# Altium PCB SENSEI_Base-Board.PcbDoc (part 10 of 10)
Units mm, origin at the board's own origin, x right, y up, seen from the top; angles counter-clockwise.
Board outline 51.6 x 28.1 mm, 8 copper layers (Top Sig/Pwr, GND1, Sig1, GND2, Sig2, Pwr, GND3, Bot Sig/Pwr), stack 1.53 mm thick; 209 components, 201 nets, 1031 pads, 2222 vias.
Unrouted connection lines stored in the file: 214.
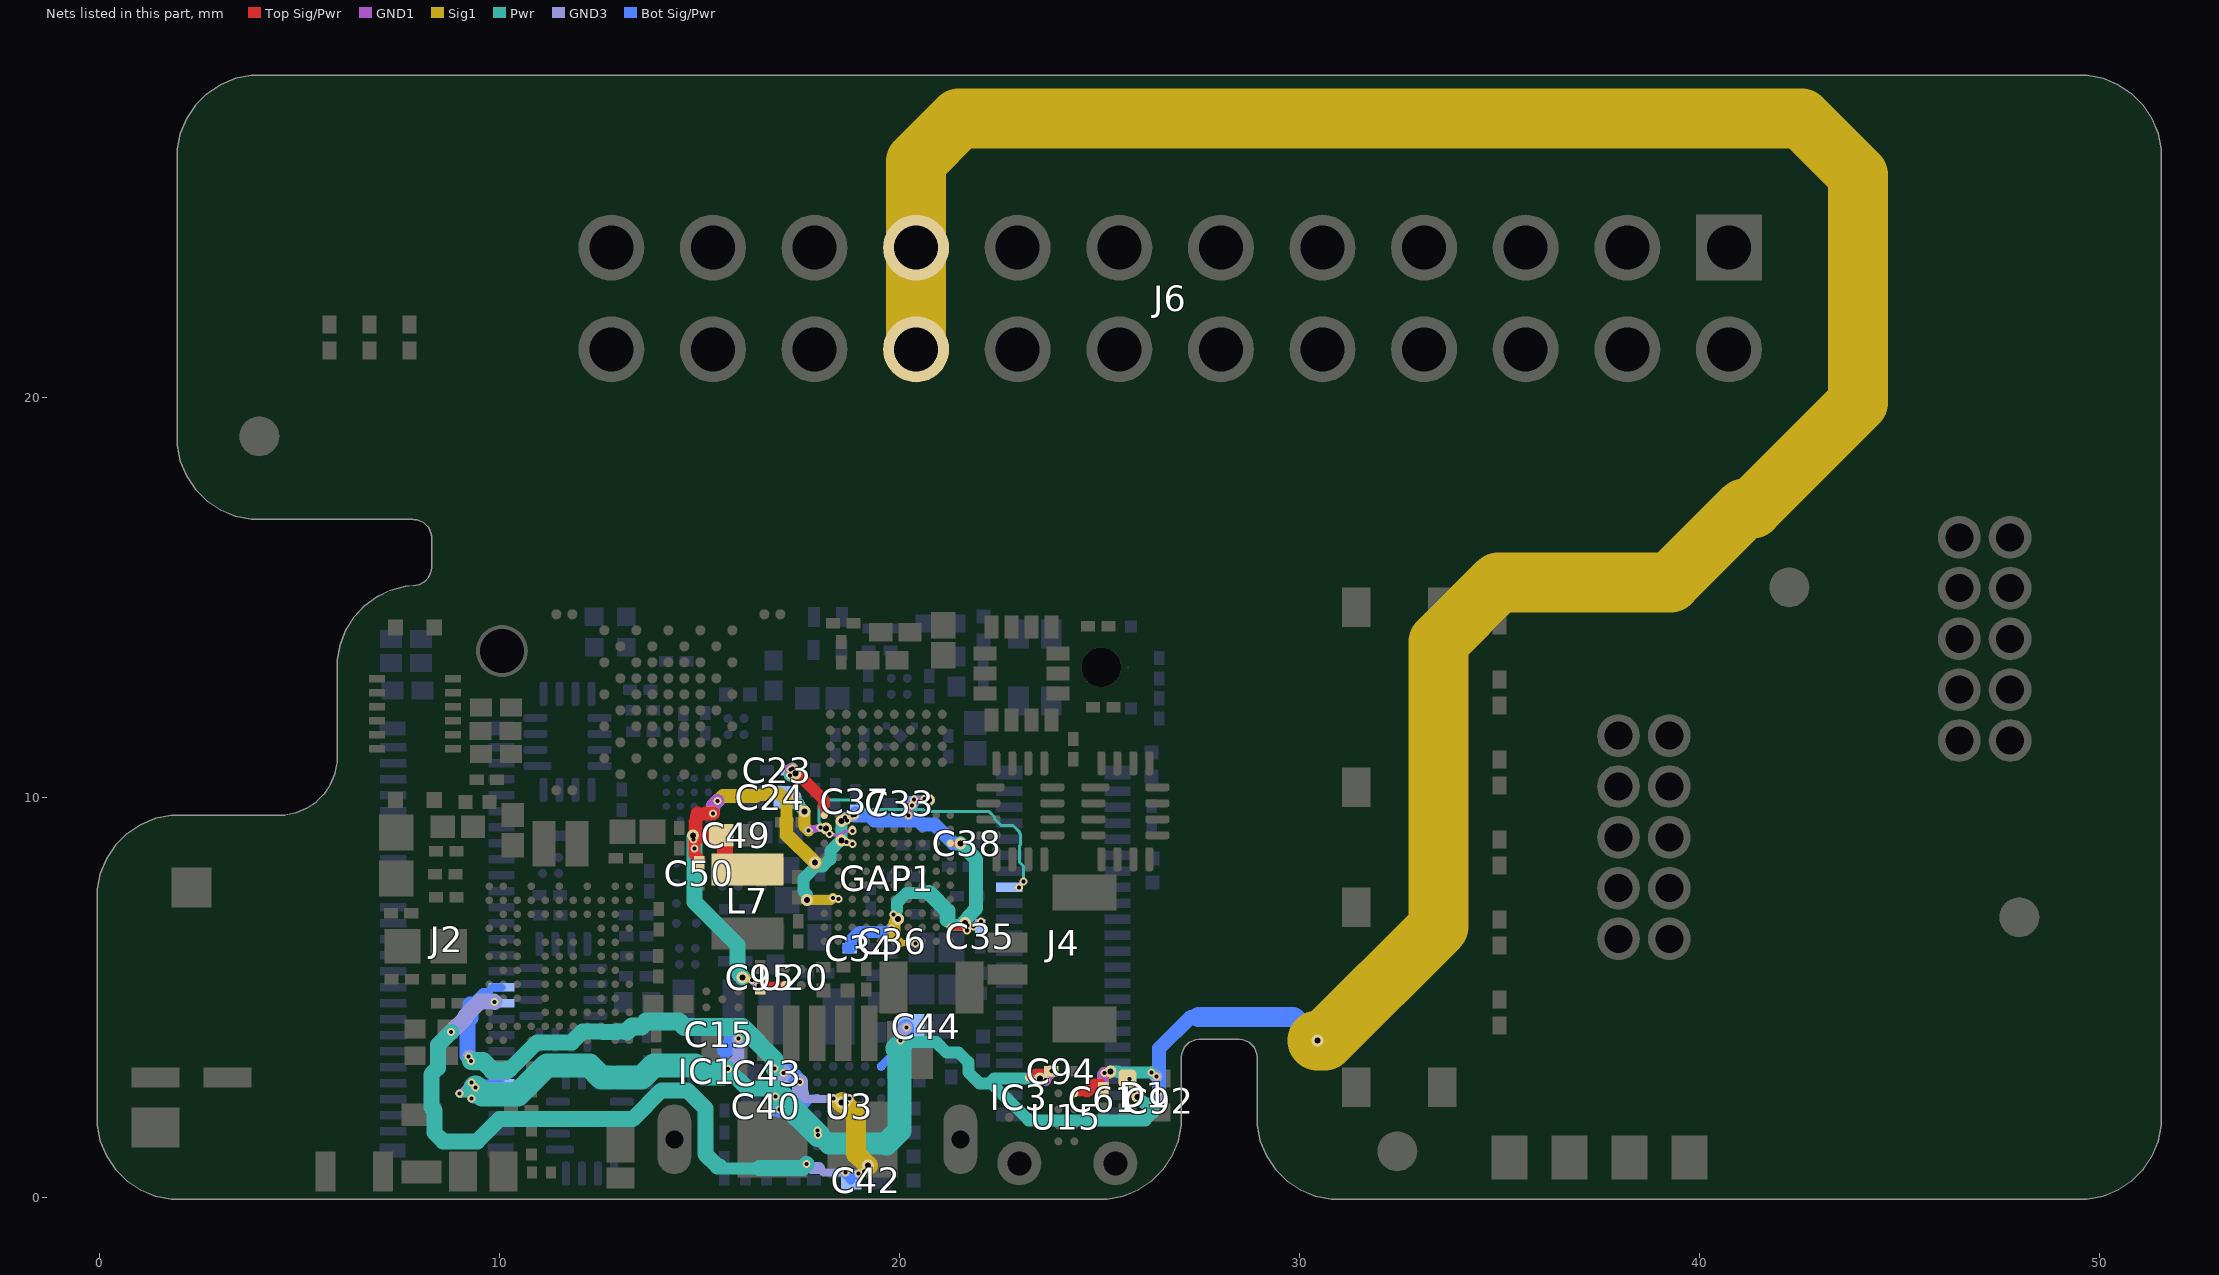
[diagram p15: the nets of this part, all layers, seen from the top]

## Via types
v1: diameter 0.2, hole 0.1, Top Sig/Pwr to GND1, 544 vias
v2: diameter 0.2, hole 0.1, GND3 to Bot Sig/Pwr, 436 vias
v3: diameter 0.2, hole 0.1, GND1 to Sig1, 385 vias
v4: diameter 0.3, hole 0.15, Sig1 to Pwr, 293 vias
v5: diameter 0.3, hole 0.15, Top Sig/Pwr to Bot Sig/Pwr, tented both sides, 284 vias
v6: diameter 0.2, hole 0.1, Pwr to GND3, 280 vias

## Nets (pads, with @x,y where several pads share a name; then routed paths per layer and width w, separated by ;. In a path a pad name is that pad's centre, name@x,y a point inside that pad or via, vN(x,y) a via of type N, cw(c..) or ccw(c..) an arc to the next point about the centre after c; other vN are vias at no path point) (continued)
VD1: C42.1 J2.9 U3.C4 | length 19.7
  GND3 w0.2: 17.987,0.735 18.104,0.618 18.562,0.618 18.569,0.625 v2(18.65,0.625) ; v6(18.684,2.36) 18.684,2.409 v2(18.75,2.475) ; v2(18.982,0.6) 19.07,0.6 v6(19.118,0.647)
  GND3 w0.3: v6(17.686,0.836) 17.707,0.836 17.808,0.735 17.987,0.735
  GND3 w0.4: v6(8.79,4.128) 9.155,4.493 9.155,4.535 9.52,4.9 9.86,4.9 v2(9.875,4.885)
  Sig1 w0.5: v4(18.558,2.365) 18.58,2.387 18.923,2.044 18.923,1.087 v4(19.217,0.793)
  Pwr w0.2: v4(18.558,2.365) 18.564,2.36 v6(18.684,2.36) ; v6(19.118,0.647) 19.118,0.666 19.217,0.765 v4(19.217,0.793)
  Pwr w0.3: 15.505,0.775 15.555,0.725 16.502,0.725 16.508,0.735
  Pwr w0.4: v6(8.79,4.128) 8.465,3.803 8.465,3.238 8.3,3.073 8.3,2.25 8.375,2.175 8.375,1.62 8.595,1.4 9.45,1.4 10.002,1.952 13.331,1.952 14.054,2.675 14.696,2.675 15.15,2.221 15.15,1.08 15.455,0.775 15.505,0.775 ; 16.508,0.735 17.585,0.735 v6(17.686,0.836)
  Bot Sig/Pwr w0.2: v2(18.65,0.625) 18.65,0.561 18.786,0.425 C42.1@18.796,0.425 ; C42.1@18.815,0.529 18.922,0.529 18.982,0.589 v2(18.982,0.6)
VD2: C43.1 J2.10 U3.D4 | length 13.3
  GND3 w0.2: 17.674,2.457 17.67,2.461 17.67,2.469 17.682,2.457 18.332,2.457 v2(18.35,2.475)
  GND3 w0.3: v2(9.224,3.525) v6@9.294,3.456 ; v2@9.228,3.529 v6@9.294,3.463
  GND3 w0.4: v6(9.294,3.403) v6@9.294,3.456 ; v6(16.884,3.222) 17.002,3.104 v2(17.105,3.104) ; v2(17.517,2.878) 17.517,2.621 17.549,2.59
  Pwr w0.4: 10.217,3.2 10.267,3.2 10.943,3.875 11.814,3.875 12.085,4.147 12.557,4.147 12.575,4.129 12.927,4.129 12.945,4.147 13.189,4.147
  Pwr w0.45: v6(9.294,3.403) 9.595,3.403 9.823,3.176 10.192,3.176 10.217,3.2 ; 13.189,4.147 13.314,4.272 13.55,4.272 13.674,4.395 14.491,4.395 14.632,4.254 16.079,4.254 16.884,3.45 v6(16.884,3.222)
  Bot Sig/Pwr w0.2: 9.277,4.824 9.588,5.135 9.72,5.135 9.825,5.24 10.045,5.24 J2.10@10.055,5.25
  Bot Sig/Pwr w0.4: v2(9.224,3.525) 9.2,3.549 9.2,4.405 9.277,4.483 9.277,4.824 ; v2(17.105,3.104) 17.075,3.134 17.075,3.15 17.096,3.15 17.133,3.114 17.282,3.114 v2(17.517,2.878)
VOPM: C23.1 GAP1.A10 | length 2.4
  Top Sig/Pwr w0.15: 18.112,9.797 18.112,9.588 18.118,9.581 18.118,9.557 GAP1.A10@18.125,9.55
  Top Sig/Pwr w0.3: v1(17.425,10.625) 18.112,9.938 18.112,9.797
  GND1 w0.3: v3(17.275,10.7) 17.35,10.625 v1(17.425,10.625)
  GND3 w0.3: v6(17.267,10.549) 17.3,10.582 17.3,10.7 v2(17.325,10.725)
  Sig1 w0.3: v3(17.275,10.7) 17.3,10.7 v4(17.4,10.6)
  Pwr w0.3: v6(17.267,10.549) 17.35,10.55 v4(17.4,10.6) 17.35,10.6 v6@17.3,10.55
  Bot Sig/Pwr w0.15: C23.1@17.254,10.675 17.374,10.675 17.431,10.618
VQPS_FUSE_1V8: GAP1.C9 J4.14 | length 8.4
  Top Sig/Pwr w0.15: GAP1.C9@18.825,9.2 18.828,9.197 v1(18.828,9.163)
  GND1 w0.075: v3(18.257,9.088) 18.281,9.065 18.368,9.065 18.37,9.062 18.538,9.062 18.615,9.14 18.805,9.14 v1(18.828,9.163)
  GND3 w0.075: v2(22.997,7.743) 22.997,7.762 23.109,7.874 v6(23.109,7.893)
  Sig1 w0.075: v4(18.163,9.22) 18.163,9.183 v3(18.257,9.088)
  Pwr w0.075: v4(18.163,9.22) 18.152,9.22 17.989,9.384 17.989,9.785 18.143,9.939 18.887,9.939 19.13,9.695 20.607,9.695 20.653,9.649 22.235,9.649 22.379,9.505 22.379,9.463 22.547,9.295 22.843,9.295 23.011,9.127 23.011,9.099 23.024,9.086 23.024,8.805 23.011,8.793 23.011,8.657 23.011,8.521 23.011,8.369 23.109,8.271 v6(23.109,7.893)
VRAR_OUT: C33.1 C34.1 C35.1 C36.1 C37.1 C38.1 C49.1 C50.1 C95.1 GAP1.B4 GAP1.C8 GAP1.C10 GAP1.G1 GAP1.G10 GAP1.K2 GAP1.K8 L7.2 U20.A2 | length 32.2
  Top Sig/Pwr w0.15: GAP1.B4@18.475,7.45 18.475,7.459 v1(18.477,7.461) ; v1(18.825,8.831) GAP1.C8@18.825,8.85 ; GAP1.G10@20.225,9.545 GAP1.G10@20.225,9.55 ; GAP1.K2@21.275,6.75 21.277,6.748 21.593,6.748 21.674,6.666 v1(21.688,6.666) ; GAP1.K8@21.275,8.85 21.277,8.848 21.527,8.848 v5(21.529,8.846)
  Top Sig/Pwr w0.2: v1(16.475,5.3) 16.475,5.246 16.525,5.196 16.525,5.214 16.606,5.295 17.145,5.295 U20.A2@17.15,5.3
  Top Sig/Pwr w0.3: 14.875,9.05 14.875,8.575 15,8.45 C50.1@15,8.404
  Top Sig/Pwr w0.35: 14.876,9.007 14.999,9.007 15,9.009 15,9.035 15.006,9.042 15.47,9.042 15.523,8.989 C49.1@15.523,8.95 ; 14.911,9.037 14.911,9.374 14.95,9.6 ; 15.137,9.6 v1(15.349,9.6)
  Top Sig/Pwr w0.4: C49.1@15.523,8.95 15.648,9.075 15.648,8.4 15.848,8.2 L7.2@16.2,8.2
  GND1 w0.15: v3(18.342,7.479) 18.351,7.47 18.468,7.47 v1(18.477,7.461) ; v3(18.679,8.88) 18.688,8.87 18.772,8.87 18.811,8.831 v1(18.825,8.831) ; v3(18.694,9.416) v3(18.694,9.416) 18.825,9.548 v1(18.825,9.55) ; v1(20.225,6.4) 20.235,6.39 20.274,6.39 20.304,6.36 20.39,6.36 v3(20.4,6.35) ; v1(21.688,6.666) 21.698,6.676 21.698,6.767 21.711,6.781 v3(21.711,6.794)
  GND1 w0.2: v3(16.32,5.434) 16.454,5.3 v1(16.475,5.3) ; v1(20.226,9.545) 20.226,9.76 20.39,9.924 20.432,9.924 ; 20.433,9.925 20.598,9.925 v3(20.634,9.96)
  GND1 w0.25: v1(15.349,9.6) v1@15.349,9.673
  GND1 w0.3: v3(14.85,8.95) 14.85,8.75 v1(14.875,8.725)
  GND1 w0.35: v1@15.349,9.673 15.349,9.793 v3(15.458,9.903)
  GND3 w0.15: v6(18.647,9.494) v6@18.657,9.504 ; v2@18.88,9.552 v2(18.893,9.552) ; v2(19.808,6.714) 19.817,6.723 19.817,6.863 19.842,6.887 19.842,7.065 v6(19.852,7.075) ; v6(21.85,6.775) 21.864,6.775 21.973,6.884 22.027,6.884 v2(22.037,6.894)
  GND3 w0.2: v2(20.313,9.796) 20.365,9.849 v6(20.365,9.951)
  GND3 w0.25: v6@18.657,9.504 18.831,9.504 v2@18.88,9.552
  Sig1 w0.15: v4(18.555,8.923) 18.584,8.894 18.651,8.894 18.665,8.88 v3(18.679,8.88) ; v4(18.556,9.403) 18.562,9.409 18.688,9.409 v3(18.694,9.416) ; 20.047,6.361 20.262,6.361 20.263,6.36 20.39,6.36 v3(20.4,6.35) ; v4(21.637,6.863) 21.64,6.863 21.708,6.794 v3(21.711,6.794)
  Sig1 w0.2: v4(14.839,9.041) 14.81,9.07 14.822,9.035 v3(14.85,8.95) ; v4(16.08,5.495) 16.099,5.476 16.279,5.476 v3(16.32,5.434) ; 19.878,6.529 20.047,6.361 ; v3(20.634,9.96) 20.647,9.948 20.726,9.948 v4(20.745,9.928)
  Sig1 w0.25: v4(17.694,7.435) 18.297,7.435 v3(18.342,7.479)
  Sig1 w0.3: 16.407,10.038 16.428,10.058 16.616,10.058 16.654,10.096 17.005,10.096 17.181,9.92 17.181,9.427 ; 19.878,6.529 19.878,6.874 v4(19.962,6.958)
  Sig1 w0.35: v3(15.458,9.903) 15.593,10.038 16.407,10.038 ; 17.181,9.427 17.181,9.073 v4(17.89,8.364)
  Pwr w0.15: v4(18.556,9.403) v6(18.647,9.494) ; v4(21.637,6.863) 21.724,6.787 v6(21.85,6.775)
  Pwr w0.2: v6(19.852,7.075) 19.962,6.964 v4(19.962,6.958) ; v6(20.365,9.951) 20.372,9.943 20.73,9.943 v4(20.745,9.928)
  Pwr w0.25: 18.284,8.448 18.284,8.505
  Pwr w0.3: v4(17.694,7.435) 17.694,7.567 17.606,7.655 17.606,7.966 17.965,8.325 18.039,8.325 18.09,8.275 ; v4@17.915,8.275 18.09,8.275 ; 18.284,8.448 18.263,8.448 18.09,8.275 ; 18.284,8.505 18.284,8.671 18.536,8.923 v4(18.555,8.923) ; v4@18.555,8.942 18.555,9.394 v4@18.561,9.4 ; 19.943,7.166 19.943,7.369 20.184,7.61 20.748,7.61 ; 21.2,6.95 21.349,6.801 21.575,6.801 21.575,6.875 21.725,7.025
  Pwr w0.35: v5(21.529,8.846) 21.924,8.451 21.924,7.224 21.725,7.025
  Pwr w0.4: v4@14.876,9.007 14.876,7.387 15.953,6.31 15.953,5.714 16.001,5.666 16.001,5.574 v4(16.08,5.495) ; 20.748,7.61 21.2,7.158 21.2,6.95
  Bot Sig/Pwr w0.3: C34.1@18.712,6.227 18.758,6.227 18.789,6.258 18.789,6.422 19.001,6.633 C36.1@19.777,6.633 ; C36.1@19.808,6.597 v2(19.808,6.714)
  Bot Sig/Pwr w0.35: v2(18.893,9.552) C37.1@18.9,9.559 ; C37.1@18.9,9.596 C37.1@18.9,9.559 ; 20.268,9.425 20.472,9.425 20.578,9.319 20.878,9.319 21.352,8.846 21.397,8.846 v5(21.529,8.846) ; C33.1@20.32,9.856 20.274,9.856 20.268,9.85 20.268,9.578 20.115,9.425 19.381,9.425 19.262,9.544 18.906,9.544 18.9,9.55 C37.1@18.9,9.559
VSAFE: C24.1 GAP1.A9 | length 1.7
  Top Sig/Pwr w0.18: v1(18.031,9.246) GAP1.A9@18.125,9.2
  GND1 w0.2: v3(17.725,9.175) v1(18.031,9.246)
  GND3 w0.3: v2(17.4,10.025) 17.4,9.925 v6(17.475,9.85)
  Sig1 w0.3: v4(17.625,9.65) 17.625,9.275 v3(17.725,9.175)
  Pwr w0.3: v6(17.475,9.85) 17.475,9.8 v4(17.625,9.65)
  Bot Sig/Pwr w0.15: C24.1@17.202,10 C24.1@17.442,9.761
VSYS: C15.1 C40.1 C44.1 C61.1 C92.1 C94.1 D1.1 IC1.A1 IC1.B1 IC3.A2 J2.3 J2.4 J6.17 J6.18 U3.A6 U3.E2 U3.E4 U15.A2 | length 101.6
  Top Sig/Pwr w0.18: IC3.A2@23.25,3 23.262,3 23.392,3.13 23.747,3.13 C94.1@23.767,3.15 ; U15.A2@24.375,2.6 24.379,2.604 24.657,2.604 24.696,2.643
  Top Sig/Pwr w0.3: 24.696,2.643 24.874,2.821 C61.1@25.036,2.821
  GND1 w0.3: v3(23.65,2.936) 23.65,2.988 23.807,3.145 v1(23.807,3.152) ; v1(25.091,2.721) 25.091,3.068 v3(25.127,3.104) ; v1(25.752,2.956) 25.752,2.78 v3(25.87,2.662)
  GND3 w0.2: v6(9,2.6) 9.048,2.6 9.148,2.7 9.175,2.7 ; v2@9.25,2.825 9.25,2.7 9.3,2.65 v2(9.3,2.475) ; v2(9.3,2.875) 9.4,2.775 v6(9.4,2.75) ; v6(16.9,2.525) 16.9,2.3 v2(17,2.2) ; v2(17.95,1.675) 17.95,1.573 v6(17.965,1.558)
  GND3 w0.3: v6(15.715,3.209) 15.975,3.47 v2(15.975,3.975) ; v6@20.019,3.919 20.019,4.094 v2(20.175,4.25) ; v6(26.311,3.12) 26.414,3.017 v2(26.424,3.017) ; v6@26.371,2.344 26.474,2.447 v2(26.474,2.63)
  Sig1 w0.2: v4(23.522,2.964) 23.541,2.945 23.642,2.945 v3(23.65,2.936)
  Sig1 w0.3: v3@25.127,3.103 25.239,3.103 v4(25.284,3.148) ; v3(25.87,2.662) 25.957,2.575 v4(25.957,2.51)
  Sig1 w1.5: J6.18@20.42,21.2 J6.17@20.42,23.74 20.42,25.895 21.49,26.965 42.559,26.965 43.965,25.559 43.965,19.864 41.327,17.226 41.125,17.226 39.274,15.375 34.976,15.375 33.482,13.882 33.482,6.769 30.634,3.921 v5(30.451,3.921)
  Pwr w0.2: v6(9,2.6) 9.225,2.6 9.3,2.675
  Pwr w0.3: 19.95,3.725 20.106,3.881 20.919,3.881 21.175,3.625 21.476,3.625 21.725,3.376 21.725,3.131 22.006,2.85 22.255,2.85 22.282,2.876 ; v4(23.522,2.964) 22.369,2.964 22.282,2.876 ; v4(25.284,3.148) 25.472,3.148 25.5,3.12 v6(26.311,3.12) ; v4@25.953,2.522 26.131,2.344 v6(26.35,2.344) 26.35,2.125 26.15,1.925 23.233,1.925 22.282,2.876
  Pwr w0.4: 15.598,3.093 v6(15.715,3.209) 15.715,3.205 16.197,2.722 16.851,2.722 16.947,2.625
  Pwr w0.5: v6(17.965,1.558) 18.004,1.558 18.243,1.319
  Pwr w0.55: 18.266,1.343 19.677,1.343
  Pwr w0.6: v6(9.4,2.75) 9.575,2.575 10.465,2.575 11.187,3.297 12.251,3.297 12.559,2.989 13.555,2.989 13.866,3.3 14.825,3.3 ; 14.888,3.297 15.092,3.093 15.598,3.093 ; 16.947,2.625 17.071,2.501 17.071,2.451 v6(17.965,1.558) ; 19.677,1.343 20.003,1.669 20.003,3.672 19.95,3.725
  Bot Sig/Pwr w0.075: IC1.A1@15.598,3.344 IC1.A1@15.6,3.342 ; IC1.B1@15.6,2.95 IC1.A1@15.6,3.342
  Bot Sig/Pwr w0.18: IC1.A1@15.6,3.342 IC1.A1@15.606,3.348 ; IC1.A1@15.6,3.35 15.604,3.35 IC1.A1@15.606,3.348 ; IC1.A1@15.607,3.348 15.607,3.638 15.649,3.68 ; IC1.A1@15.609,3.345 IC1.A1@15.606,3.348
  Bot Sig/Pwr w0.2: v2(9.3,2.475) 9.3,2.559 9.217,2.642 9.217,2.758 9.3,2.841 v2(9.3,2.875) 9.325,2.85 J2.4@10.055,2.85 ; v2@9.317,2.492 9.359,2.45 9.409,2.45 ; v2@9.367,2.492 9.409,2.45 ; J2.3@10.055,2.45 9.409,2.45 ; 17.473,2.374 17.477,2.378 ; 17.641,2.378 17.695,2.378 17.789,2.471 17.946,2.471 U3.E4@17.95,2.475 ; U3.A6@19.55,3.275 19.55,3.28 19.788,3.518 19.788,3.6
  Bot Sig/Pwr w0.3: 17.477,2.378 17.641,2.378 ; v2(26.474,2.63) 26.487,2.642 C92.1@26.487,2.706
  Bot Sig/Pwr w0.35: C92.1@26.495,2.722 26.495,3.719 27.289,4.513 27.475,4.513
  Bot Sig/Pwr w0.4: 15.649,3.68 15.821,3.852 15.821,4.039 C15.1@15.857,4.075 ; C15.1@15.879,4.075 15.975,3.979 v2(15.975,3.975) ; v2(17,2.2) 17,2.269 17.043,2.311 17.277,2.311 17.346,2.38 17.479,2.38 ; 19.908,3.6 20.172,3.864 C44.1@20.172,4.241
  Bot Sig/Pwr w0.5: 27.475,4.513 29.859,4.513 v5(30.451,3.921)
  other v6: 20.025,3.925
pads on no net: E1.2 E1.3 E1.4 FID1.0 FID2.0 FID3.0 FID4.0 FID5.0 FID6.0 FID7.0 FID8.0 GAP1.C3 GAP1.C4 GAP1.E6 GAP1.F6 GAP1.F7 GAP1.G8 GAP1.G9 GAP1.K10 J1.6 J1.7 J1.8 J1.9 J1.10 J1.11 J2.56 J3.7 J3.8 J4.24 J4.28 J4.30 J4.32 J4.41 J4.42 J4.43 J4.44 J5.MP1 J5.MP2 J5.MP3 J5.MP4 U1.A1 U1.A12 U1.B1 U1.B12 U1.D3 U1.D5 U1.D7 U1.D9 U1.D11 U1.E2 U1.E4 U1.E6 U1.E8 U1.E10 U1.F3 U1.F9 U1.F11 U1.G2 U1.G4 U1.G9 U1.G10 U1.H3 U1.H4 U1.H11 U1.J2 U1.J10 U1.K3 U1.K4 U1.K5 U1.K6 U1.K7 U1.K8 U1.K9 U1.K11 U1.L2 U1.L4 U1.L6 U1.L8 U1.L10 U1.M2 U1.M3 U1.M5 U1.M7 U1.M9 U1.M11 U1.P1 U1.P12 U1.R1 U1.R12 U2.A2 U2.A3 U2.A4 U2.A5 U2.A6 U2.B1 U2.B2 U2.B3 U2.B4 U2.B5 U2.B8 U2.C1 U2.C8 U3.A1 U5.D11 U9.2 U9.8 U9.9 U9.10 U10.2 U10.10 U11.2 U11.10 U12.2 U12.10 U13.2 U13.10 U17.A1 U17.B1 U17.C1 U17.C4 U17.D1 U17.D2 U17.D3 U21.10 Y2.4 Y3.4

## Polygon pours and split planes (outlines as drawn)
GND on Top Sig/Pwr "GND_L01_P028" (solid, pour order 28): 53,-2.5 53,30 -0.5,30 -0.5,10.55 7,10.55 7,-2.5
GND on Top Sig/Pwr "NONET_L-01_P-001" (solid, pour order 27): 7,1.45 10.1,1.45 10.4,1.45 10.4,1.875 9.9,1.875 9.9,3 7,3
NetL6_2 on Top Sig/Pwr "NONET_L-01_P-001" (solid, pour order 26): 6.825,0.189 6.825,0.15 9,0.15 9,1.15 6.825,1.15
NetC68_1 on Top Sig/Pwr "NONET_L-01_P-001" (solid, pour order 18): 9.65,1.15 9.65,0.15 10.425,0.15 10.425,1.15
GND on GND1 "GND_L02_P019" (solid, pour order 19): 53,-2.5 53,30 -0.5,30 -0.5,10.55 7,10.55 7,-2.5
GND on Sig1 "GND_L03_P020" (solid, pour order 20): 53,-2.5 53,30 -0.5,30 -0.5,10.55 7,10.55 7,-2.5
GND on GND2 "GND_L04_P021" (solid, pour order 21): 53,-2.5 53,30 -0.5,30 -0.5,10.55 7,10.55 7,-2.5
GND on Sig2 "GND_L05_P022" (solid, pour order 22): 53,-2.5 53,30 -0.5,30 -0.5,10.55 7,10.55 7,-2.5
GND on GND3 "GND_L07_P024" (solid, pour order 24): 53,-2.5 53,30 -0.5,30 -0.5,10.55 7,10.55 7,-2.5
GND on Bot Sig/Pwr "GND_L08_P025" (solid, pour order 25): 53,-2.5 53,30 -0.5,30 -0.5,10.55 7,10.55 7,-2.5
GND on Pwr "GND_L06_P023" (solid, pour order 23): 53,-2.5 53,30 -0.5,30 -0.5,10.55 7,10.55 7,-2.5

## Keep-outs
Keep-Out Layer:
  circle w0.1: c5,25 r1.6
  circle w0.1: c48.5,3 r1.6
  circle w0.1: c48.5,25 r1.6
  lines w0.1: 8.307,15.745 8.3,15.664 8.242,15.511 8.133,15.39 7.988,15.315 7.908,15.298 7.85,15.295 7.658,15.281 7.286,15.182 6.939,15.015 6.629,14.787 6.367,14.505 6.162,14.179 6.021,13.821 5.95,13.442 5.95,13.25 5.95,11 5.943,10.858 5.887,10.579 5.778,10.317 5.621,10.08 5.42,9.879 5.183,9.722 4.921,9.613 4.642,9.557 4.5,9.55 2.5,9.55 2,9.55 1.798,9.55 1.402,9.472 1.029,9.317 0.693,9.093 0.407,8.807 0.183,8.471 0.028,8.098 -0.05,7.702 -0.05,7.5 -0.05,2 -0.05,1.798 0.028,1.402 0.183,1.029 0.407,0.693 0.693,0.407 1.029,0.183 1.402,0.028 1.798,-0.05 3.798,-0.05 25.202,-0.05 25.598,0.028 25.971,0.183 26.307,0.407 26.592,0.693 26.817,1.028 26.971,1.402 27.05,1.798 27.05,1.999 27.05,3.5 27.059,3.588 27.126,3.75 27.25,3.874 27.412,3.941 27.5,3.95 28.5,3.95 28.588,3.941 28.75,3.874 28.874,3.75 28.941,3.588 28.95,3.5 28.95,2 28.95,1.798 29.028,1.402 29.183,1.029 29.407,0.693 29.693,0.407 30.029,0.183 30.402,0.028 30.798,-0.05 31,-0.05 49.5,-0.05 49.702,-0.05 50.098,0.028 50.471,0.183 50.807,0.407 51.093,0.693 51.317,1.029 51.472,1.402 51.55,1.798 51.55,2 ; 8.307,15.75 8.307,16.495 8.299,16.583 8.232,16.745 8.107,16.869 7.945,16.936 7.858,16.945 7.836,16.95 4,16.95 3.798,16.95 3.402,17.028 3.029,17.183 2.693,17.407 2.407,17.693 2.183,18.029 2.028,18.402 1.95,18.798 1.95,19 1.95,26 1.95,26.202 2.028,26.598 2.183,26.971 2.407,27.307 2.693,27.593 3.029,27.817 3.402,27.972 3.798,28.05 4,28.05 49.5,28.05 49.702,28.05 50.098,27.972 50.471,27.817 50.807,27.593 51.093,27.307 51.317,26.971 51.472,26.598 51.55,26.202 51.55,26 ; 9.358,15.75 9.358,16.495 9.358,16.595 9.434,16.778 9.574,16.919 9.758,16.995 9.858,16.995 ; 51.55,2 51.55,26 ; 9.358,15.726 9.358,15.726 ; 9.358,15.726 9.358,15.63 9.431,15.454 9.566,15.319 9.743,15.245 9.838,15.245 14,15.25 ; 9.858,16.995 9.858,16.995 ; 9.858,16.995 9.858,16.994 14,16.998 14,17 14.099,17 14.283,16.924 14.424,16.783 14.5,16.599 14.5,16.5 ; 14,15.25 14,15.25 ; 14,15.25 14,15.25 ; 14,15.25 14.099,15.25 14.283,15.326 14.424,15.467 14.5,15.651 14.5,15.75 14.5,16.5 ; 14.5,16.5 14.5,16.5 ; 15.5,15.75 15.5,15.75 ; 15.5,15.75 15.5,15.651 15.576,15.467 15.717,15.326 15.901,15.25 16,15.25 22,15.25 ; 15.5,15.75 15.5,16.5 15.5,16.599 15.576,16.783 15.717,16.924 15.901,17 16,17 ; 16,17 22,17 22.099,17 22.283,16.924 22.424,16.783 22.5,16.599 22.5,16.5 ; 16,17 16,17 ; 22,15.25 22,15.25 ; 22,15.25 22.099,15.25 22.283,15.326 22.424,15.467 22.5,15.651 22.5,15.75 22.5,16.5 ; 22.5,16.5 22.5,16.5 ; 23.5,15.75 23.5,15.75 ; 23.5,15.75 23.5,15.651 23.576,15.467 23.717,15.326 23.901,15.25 25,15.25 25.196,15.24 25.581,15.164 25.943,15.014 26.269,14.796 26.546,14.519 26.764,14.193 26.914,13.831 26.99,13.446 27,13.25 27,11.5 ; 23.5,15.75 23.5,16.5 23.5,16.599 23.576,16.783 23.717,16.924 23.901,17 24,17 ; 24,17 27,17 27.197,17 27.583,16.923 27.947,16.772 28.275,16.553 28.554,16.275 28.772,15.947 28.923,15.583 29,15.197 29,15 ; 24,17 24,17 ; 27,5.5 27,5.401 27.076,5.217 27.217,5.076 27.401,5 27.5,5 28.5,5 ; 27,5.5 27,5.5 ; 27,5.5 27,9.5 27,9.599 27.076,9.783 27.217,9.924 27.401,10 27.5,10 ; 27,11.5 27,11.401 27.076,11.217 27.217,11.076 27.401,11 28.5,11 ; 27,11.5 27,11.5 ; 27.5,10 28.5,10 28.599,10 28.783,9.924 28.924,9.783 29,9.599 29,9.5 ; 27.5,10 27.5,10 ; 28.5,5 28.599,5 28.783,5.076 28.924,5.217 29,5.401 29,5.5 29,9.5 ; 28.5,5 28.5,5 ; 28.5,11 28.599,11 28.783,11.076 28.924,11.217 29,11.401 29,11.5 29,15 ; 28.5,11 28.5,11 ; 29,9.5 29,9.5 ; 29,15 29,15

## Other copper
Top Sig/Pwr:
  pour cut-out: 7,1.25 10.4,1.25 10.4,1.402 7,1.402
  pour cut-out: 10.05,1.875 10.05,4.075 11.35,4.075 11.35,3.475 11.4,3.425 11.4,1.025 11.4,0.625 11.175,0.625 11.175,0.05 10.4,0.05 10.4,1.875
GND1:
  pour cut-out: 6.825,1.15 10.45,1.15 10.45,-0.1 6.825,-0.1
GND2:
  pour cut-out: 6.825,1.15 10.425,1.15 10.425,-0.1 6.825,-0.1
Sig2:
  pour cut-out: 6.825,1.15 10.425,1.15 10.425,-0.1 6.825,-0.1
Sig1:
  pour cut-out: 6.825,1.15 10.45,1.15 10.45,-0.1 6.825,-0.1
Pwr:
  pour cut-out: 6.825,1.15 10.425,1.15 10.425,-0.1 6.825,-0.1
  pour cut-out: 12.2,7.1 13.65,5.65 13.65,5.225 14.225,5.225 14.675,5.675 14.575,5.775 14.575,6.725 14.325,6.725 13.325,7.725
  pour cut-out: 18.2,7.7 17.9,7.55 17.975,6.55 18.775,5.2 19.3,4.625 20.55,4.525 23.2,4.95 25.125,5.3 25.05,7.4 23.925,7.55 22.475,7.325 21.55,6.65 19.775,7.05 19.8,8.625 18.2,8.15
Bot Sig/Pwr:
  region net GND: 34.009,1.275 33.768,2.363 34.056,2.363 34.15,1.937 34.203,1.811 34.265,1.699 34.327,1.599 34.39,1.534 34.439,1.499 34.489,1.474 34.527,1.474 34.564,1.487 34.589,1.512 34.595,1.549 34.595,1.599 34.589,1.643 34.429,2.363 34.706,2.363 34.826,1.811 34.871,1.605 34.876,1.512 34.863,1.425 34.838,1.35 34.788,1.3 34.726,1.262 34.676,1.25 34.577,1.25 34.477,1.275 34.39,1.325 34.324,1.39 34.252,1.474 34.296,1.275
  region net GND: 31.466,2.342 31.523,2.363 31.585,2.372 31.685,2.372 31.797,2.363 31.915,2.334 32.015,2.285 32.096,2.222 32.146,2.172 32.196,2.11 32.239,2.035 32.27,1.961 32.302,1.873 32.32,1.792 32.333,1.711 32.333,1.605 32.32,1.512 32.302,1.449 32.27,1.387 32.233,1.337 32.183,1.3 32.127,1.275 32.071,1.262 31.946,1.25 31.884,1.25 31.772,1.262 31.702,1.28 31.672,1.287 31.646,1.532 31.703,1.512 31.784,1.493 31.847,1.487 31.89,1.487 31.94,1.499 31.984,1.524 32.009,1.549 32.027,1.587 32.04,1.63 32.046,1.674 32.046,1.73 32.034,1.811 32.009,1.892 31.978,1.961 31.94,2.017 31.884,2.085 31.834,2.116 31.784,2.135 31.734,2.141 31.66,2.141 31.591,2.135 31.56,2.129 31.516,2.116
  region net GND: 32.688,1.275 32.447,2.363 32.702,2.363 32.944,1.275
  region net GND: 33.291,2.06 33.224,2.363 33.48,2.363 33.721,1.275 33.466,1.275 33.427,1.451 33.367,1.643 33.299,1.811 33.243,1.917 33.165,2.02 33.112,2.073 33.068,2.104 33.025,2.123 32.993,2.123 32.951,2.112 32.894,2.372 32.931,2.378 32.969,2.378 33.006,2.372 33.062,2.347 33.099,2.322 33.149,2.278 33.193,2.235 33.243,2.16
  region net GND: 30.943,2.247 31.015,2.163 30.857,2.872 31.113,2.872 31.466,1.275 31.211,1.275 31.117,1.7 31.064,1.827 31.002,1.939 30.94,2.038 30.877,2.104 30.828,2.138 30.778,2.163 30.74,2.163 30.703,2.151 30.678,2.126 30.672,2.088 30.672,2.038 30.678,1.995 30.839,1.275 30.561,1.275 30.441,1.827 30.396,2.032 30.391,2.126 30.404,2.213 30.429,2.288 30.479,2.338 30.541,2.375 30.591,2.387 30.69,2.387 30.79,2.363 30.877,2.313
  region net GND: 36.368,1.25 35.636,4.366 36.786,4.366 37.062,3.193 37.86,3.193 37.585,4.366 44.876,4.366 45.608,1.25 42.66,1.25 42.47,2.06 44.2,2.06 44.111,2.44 42.456,2.44 42.28,3.188 43.937,3.188 43.849,3.556 41.169,3.556 41.713,1.25 40.495,1.25 39.952,3.556 38.925,3.556 39.466,1.25 38.316,1.25 38.036,2.445 37.238,2.445 37.518,1.25
  region net GND: 34.848,2.746 35.79,2.746 35.848,2.487 35.278,2.487 36.08,1.442 36.116,1.275 35.175,1.275 35.117,1.534 35.689,1.534 34.884,2.584

## Silkscreen, mask and mechanical layers (free items; w line width, h text height)
F.SilkS:
  drawing of 81 lines, arcs and shapes, not listed
  text "GAP GPIO87" at 38.72,26.82 h0.7
  text "VSYS" at 15.276,26.295 h0.7
  text "1.8V" at 21.276,26.295 h0.7
  text "I GAP MEM" at 26.276,26.295 h0.7
  text "I IMU" at 33.776,26.295 h0.7
  text "GND" at 9.82,26.22 h0.7
  text "nRF P0.29" at 38.82,25.82 h0.7
  text "I nRF" at 42.776,22.795 h0.7
  text "GAP GPIO86" at 35.02,18.12 h0.7
  text "I GAP" at 28.52,17.82 h0.7
  text "VUSB" at 13.026,17.795 h0.7
  text "VBAT" at 18.276,17.795 h0.7
  text "I MIC" at 23.276,17.795 h0.7
  text "nRF P1.07" at 35.12,17.12 h0.7
  text "1" at 36.955,15.82 h0.7 r90
  text "1" at 45.855,15.72 h0.7 r90
  text "nRF Debug" at 50.43,11.37 h0.6 r90
  text "nRF BTN" at 30.33,10.62 h0.6 r90
  text "GAP9 Debug" at 41.93,6.12 h0.6 r90
  text "GAP BTN" at 30.255,2.945 h0.6 r90
B.SilkS:
  drawing of 80 lines, arcs and shapes, not listed
  text "GAP GPIO87" at 41.63,26.87 h0.7
  text "VBAT" at 20.738,26.368 h0.7
  text "I MIC" at 26.436,26.367 h0.7
  text "I GAP" at 31.63,26.37 h0.7
  text "VUSB" at 15.78,26.32 h0.7
  text "nRF P0.29" at 41.63,25.87 h0.7
  text "I nRF" at 45.88,22.87 h0.7
  text "GND" at 10.605,22.845 h0.7
  text "GAP GPIO86" at 45.38,18.12 h0.7
  text "VSYS" at 17.88,17.87 h0.7
  text "1.8V" at 23.63,17.87 h0.7
  text "I GAP MEM" at 31.63,17.87 h0.7
  text "I IMU" at 36.88,17.87 h0.7
  text "nRF P1.07" at 45.43,17.07 h0.7
  text "Sebastian Frey" at 3.148,8.751 h0.8 r90
  text "SENSEI v1.1" at 1.915,7.648 h0.8 r90
Mechanical 1:
  drawing of 228 lines, arcs and shapes, not listed
  text "SENSEI" at 34.906,15.9 h2 r180